# Altium PCB plobot_review.PcbDoc (part 2 of 2)
Units mil, origin at the board's own origin, x right, y up, seen from the top; angles counter-clockwise.
Board outline 3546.59 x 5237.31 mil, 2 copper layers (Top Layer, Bottom Layer); 114 components, 89 nets, 446 pads, 122 vias.
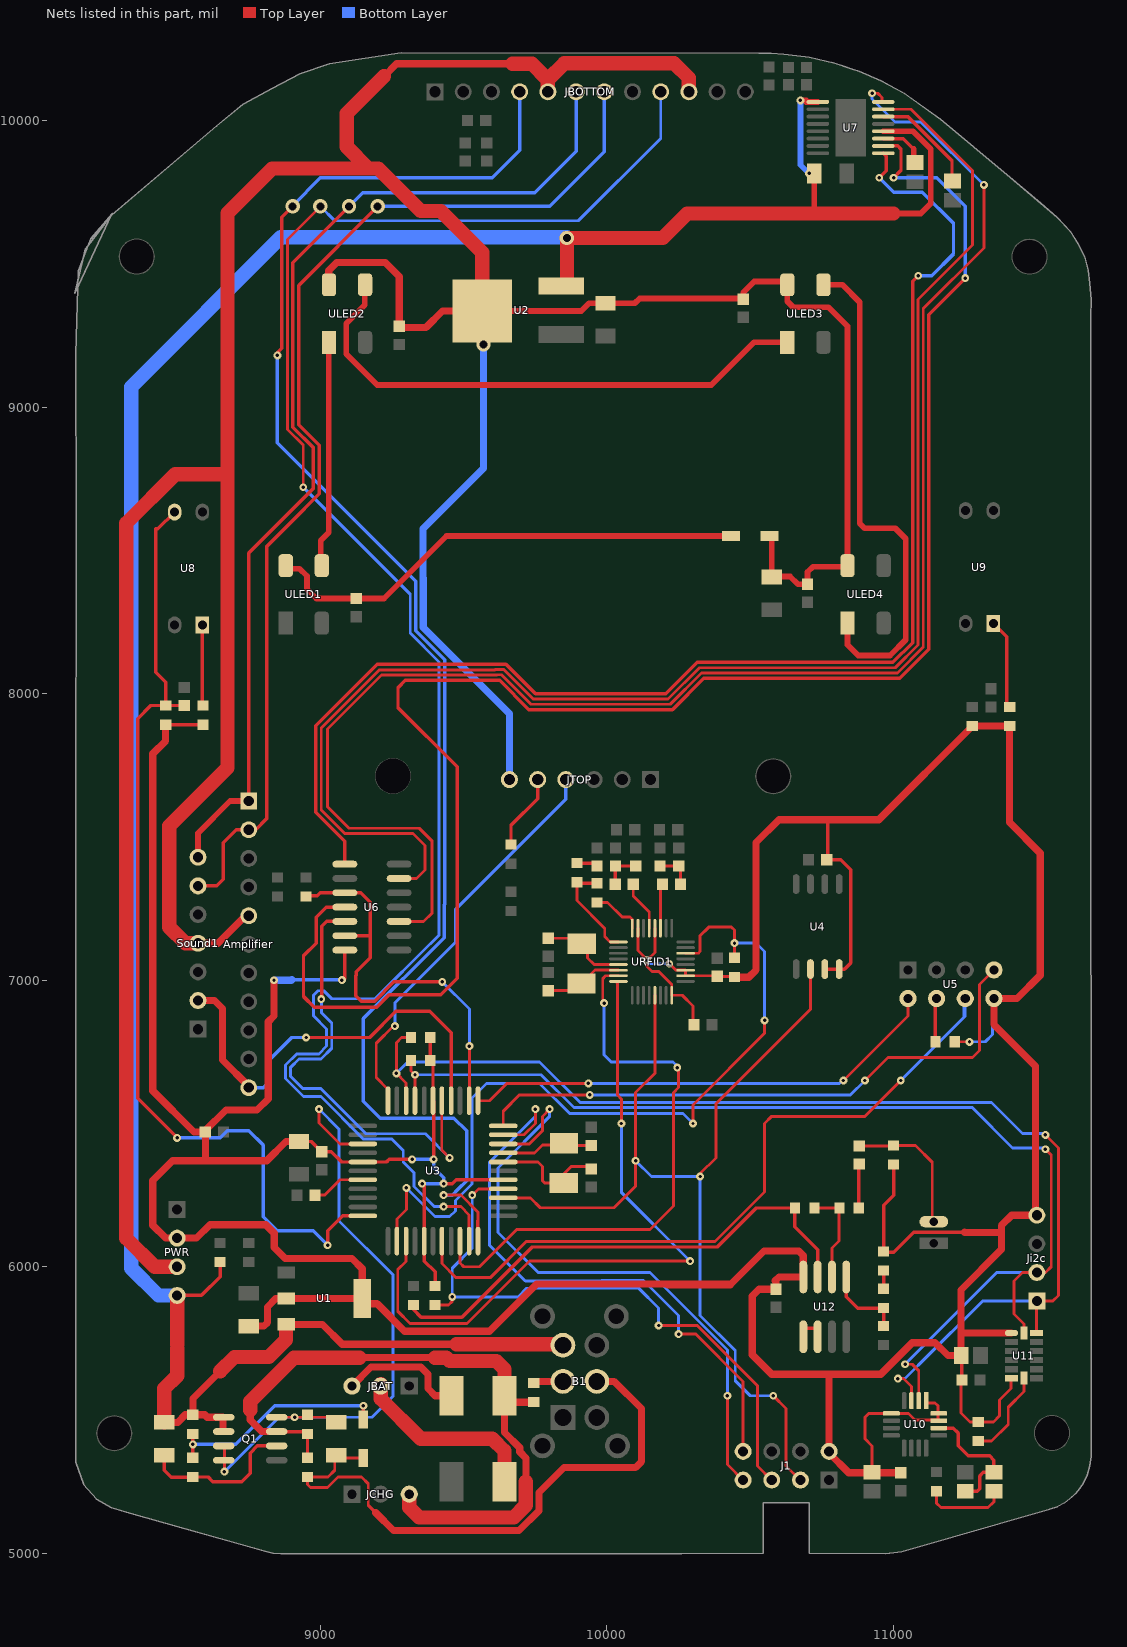
[diagram p2: the nets of this part, all layers, seen from the top]

## Via types
v1: diameter 27.56, hole 12, Top Layer to Bottom Layer, 101 vias
v2: diameter 50, hole 28, Top Layer to Bottom Layer, 16 vias
v3: diameter 25.98, hole 12, Top Layer to Bottom Layer, 4 vias
v4: diameter 27.6, hole 12, Top Layer to Bottom Layer, 1 vias

## Nets (pads, with @x,y where several pads share a name; then routed paths per layer and width w, separated by ;. In a path a pad name is that pad's centre, name@x,y a point inside that pad or via, vN(x,y) a via of type N, cw(c..) or ccw(c..) an arc to the next point about the centre after c; other vN are vias at no path point) (continued)
MTR-R-D2: U3.16 U6.12 | length 1605.7
  Top Layer w10: U3.16@9423.95,6579.55 9423.22,6578.82 9423.22,6407.78 v1(9451,6380)
  Top Layer w12: v1@9004.78,6945.78 9004.78,7187.78 9022,7205 U6.12@9085.51,7205
  Bottom Layer w10: v1(9003,6934) 9004,6935 9004,6886.46 9039.78,6850.68 9039.78,6762.45 9002.33,6725 8925,6725 8896.22,6696.22 8896.22,6663.91 8938.13,6622 9001,6622 9159,6464 9367,6464 v1(9451,6380)
MTR-R-EN: R15.2 U3.13 U6.10 U6.13 | length 1470.2
  Top Layer w10: U3.13@9518.95,6579.55 9520,6580.6 v1(9520,6770)
  Top Layer w12: R15.2@8949.53,7296 8951.53,7294 8989,7294 9000,7305 U6.10@9085.51,7305 9141,7305 9174,7272 9174,7155 ; U6.13@9085.51,7155 9174,7155 ; v1(9425,6994) 9256,6994 9189,6927 9142,6927 9124,6945 9124,7016 9125,7017 9125,7030 9174,7079 9174,7155
  Bottom Layer w10: v1(9425,6994) 9520,6899 v1(9520,6770)
MTR-R-I: C21.2 R17.1 U3.33 U8.3 | length 3462.1
  Top Layer w12: R17.1@8465,7963.46 8470,7958.46 8470.04,7958.5 C21.2@8525,7958.5 ; U8.3@8491.12,8633.47 8432.65,8575 8425,8575 8425,8075 8460,8040 R17.1@8460,7958.46 8408.46,7958.46 8362,7912 8362,6588 v1(8500,6450) ; v1(9025,6075) 9025,6125 9077.55,6177.55 U3.33@9147.95,6177.55
  Bottom Layer w12: v1(8500,6450) 8650,6450 8675,6475 8750,6475 8800,6425 8800,6175 8850,6125 8975,6125 v1(9025,6075)
NetB1_2: B1.2 CFG1.2 | length 104.8
  Top Layer w25: CFG1.2@9744.09,5594.49 9749.85,5600.24 B1.2@9846.2,5600.24 B1.2@9845.96,5600
NetB1_5: B1.5 C2.1 D1.1 R3.1 | length 2096.1
  Top Layer w10: R3.1@8955,5265 8955,5240 8965,5230 9025,5230 9061.54,5266.54 9143.46,5266.54 9167,5243 9167,5168 9193.07,5141.93 ; R3.1@8955,5266.54 9026.54,5266.54 9050,5290 C2.1@9050,5340 ; C2.1@9060,5335 9061.93,5333.07 D1.1@9150,5333.07 ; B1.5@9960,5600 B1.5@9962.03,5597.97
  Top Layer w25: 9193.07,5141.93 9255.34,5079.66 9693.43,5079.66 9762.36,5148.59 9762.36,5212.36 9850,5300 10100,5300 10120,5320 10120,5440 10120,5505 10024.76,5600.24 B1.5@9964.31,5600.24
NetC1_2: C1.2 Q1.2 R6.2 | length 553.1
  Top Layer w12: C1.2@8455,5340 8455,5290 8480,5265 8553.46,5265 R6.2@8555,5266.54 8608.46,5266.54 8625,5250 8725,5250 8755,5280 8755,5350 8780,5375 Q1.2@8847.52,5375
NetC6_2: C6.2 U3.7 XTAL1.2 | length 412.5
  Top Layer w10: U3.7@9637.95,6365.55 9759.45,6365.55 9775,6350 9775,6300 9782.58,6292.43 XTAL1.2@9849.06,6292.43 9849.06,6324.06 9875,6350 9900,6350 9936.5,6350 C6.2@9945,6341.5
NetC7_2: C7.2 U3.8 XTAL1.1 | length 310.3
  Top Layer w10: U3.8@9637.95,6397.55 9747.55,6397.55 9775,6425 9843.84,6425 XTAL1.1@9850.05,6431.2 ; XTAL1.1@9860.75,6423.5 C7.2@9945,6423.5
NetC8_1: C8.1 U3.29 | length 195.1
  Top Layer w10: C8.1@8975,6250 C8.1@8981.5,6250 9015,6250 9068.55,6303.55 U3.29@9147.95,6303.55
NetC14_2: C14.2 U7.11 | length 170.1
  Top Layer w12: U7.11@10964.17,9936.61 11033.39,9936.61 11070,9900
  Top Layer w20: C14.2@11060,9855 11070,9865 11070,9900
NetC17_2: C17.2 U7.14 | length 383.4
  Top Layer w12: U7.14@10964.17,10013.39 11051.61,10013.39 11055,10010 ; 11053.94,10010 11203.94,9860 11203.94,9796.06 C17.2@11205,9795 ; C17.2@11205,9788.46 C17.2@11205,9795 ; C17.2@11210,9790 C17.2@11205,9795
NetC26_1: C26.1 C27.1 U10.14 | length 460.8
  Top Layer w12: U10.14@11157.68,5437.2 11207.8,5437.2 11225,5420 11225,5375 11260,5340 11335,5340 11350,5325 C26.1@11350,5283.46 11313.46,5283.46 11300,5270 11300,5225 11291.54,5216.54 C27.1@11250,5216.54
NetC26_2: C26.2 R20.1 | length 286
  Top Layer w10: R20.1@11150,5216.54 11150,5175 11165,5160 11330,5160 11350,5180 C26.2@11350,5210
NetC28_1: C28.1 D2.1 ULED1.4 | length 1743.1
  Top Layer w20: ULED1.4@8878.94,8435.61 8927.39,8435.61 8953,8410 8953,8365 8986.5,8331.5 C28.1@9125,8331.5 9221.5,8331.5 9440,8550 10295,8550 ; 10330,8550 10295,8550 ; D2.1@10425,8545 10420,8550 10295,8550
NetC33_1: C33.1 R25.1 | length 155.6
  Top Layer w12: R25.1@10878.46,6205 10878.46,6358.46 C33.1@10880,6360
NetC33_2: C33.2 MIC1.1 R23.2 | length 501.9
  Top Layer w10: C33.2@10880,6421.5 10998.5,6421.5 R23.2@11000,6420 ; R23.2@11000,6423.46 11076.54,6423.46 11135,6365 11135,6150 MIC1.1@11140,6145
NetC38_1: C38.1 R30.1 | length 74.1
  Top Layer w12: R30.1@9895,7408.46 9955.04,7408.46 C38.1@9965,7398.5
NetC39_1: C39.1 C40.2 L1.2 | length 131.2
  Top Layer w12: C40.2@10185,7398.5 C39.1@10250,7398.5 10256.5,7392.01 L1.2@10256.5,7335
NetC42_1: C42.1 C45.1 L2.2 | length 134.1
  Top Layer w12: L2.2@10028.5,7335 10028.5,7397.01 C45.1@10030,7398.5 C42.1@10100,7398.5
NetC44_1: C44.1 URFID1.22 XRFID1.2 | length 239.4
  Top Layer w10: C44.1@9795,6963.5 XRFID1.2@9886.14,6963.5 ; XRFID1.2@9911.06,6988.43 9957.64,7035 URFID1.22@10040,7035
NetC46_1: C46.1 URFID1.21 XRFID1.1 | length 292.8
  Top Layer w10: C46.1@9795,7146.5 9885.55,7146.5 XRFID1.1@9912.05,7120 ; XRFID1.1@9912.05,7127.2 9932,7107.25 9932,7078 9955.31,7054.69 URFID1.21@10029.69,7054.69
NetD1_2: D1.2 R5.1 R6.1 | length 775.5
  Top Layer w12: R6.1@8555,5333.46 v1(8555,5380) R5.1@8555,5415 ; D1.2@9150,5466.93 v1@9150,5510
  Bottom Layer w12: v1(8555,5380) 8705,5380 8840,5515 v1(9150,5515)
NetF1_1: F1.1 JBAT.3 | length 445.8
  Top Layer w25: JBAT.3@9110,5583.46 9176.54,5650 9350,5650 9375,5625 9375,5575 9400,5550 F1.1@9457.48,5550
NetF2_1: F2.1 JBAT.2 | length 665.7
  Top Layer w50: JBAT.2@9210,5590.13 JBAT.2@9210,5583.46 9210,5540 9350,5400 9600,5400 9642.52,5357.48 F2.1@9642.52,5250
NetJTOP_5: JTOP.5 R1.2 | length 300.2
  Top Layer w10: R1.2@9665,7473.46 9665,7508.55
  Top Layer w12: R1.2@9665,7473.46 9665,7540 9758.03,7633.03 JTOP.5@9758.03,7700
NetL1_1: L1.1 URFID1.11 | length 158.7
  Top Layer w10: L1.1@10185,7330 10186.65,7328.35 L1.1@10186.65,7328.15 ; URFID1.11@10186.65,7181.65 L1.1@10186.65,7328.15 ; L1.1@10193.5,7335 L1.1@10186.65,7328.15
NetL2_1: L2.1 URFID1.13 | length 176.5
  Top Layer w10: L2.1@10091.5,7335 10091.5,7293.5 10147.28,7237.72 URFID1.13@10147.28,7181.65
NetR13_2: R13.2 U5.CH_PD | length 145.6
  Top Layer w12: U5.CH_PD@11145,6930 11145,6786.54 R13.2@11146.54,6785
NetR16_1: R16.1 U8.1 | length 286
  Top Layer w12: R16.1@8588.25,7961.71 R16.1@8588.25,7960.22 ; R16.1@8590,7958.46 R16.1@8588.25,7960.22 ; U8.1@8590,8238.01 U8.1@8588.25,8239.77 R16.1@8588.25,7960.22
NetR18_1: R18.1 U9.1 | length 310.7
  Top Layer w12: U9.1@11348.25,8244.77 11395,8198.01 R18.1@11395,7953.46
NetR21_2: R21.2 U11.7 | length 319.1
  Top Layer w10: R21.2@11295,5391.54 11341.54,5391.54 11400,5450 11400,5510 11455,5565 11455,5610 U11.7@11460,5615
NetR22_1: R22.1 R25.2 U12.6 | length 326.7
  Top Layer w10: R22.1@10723.46,6205 R25.2@10820,6205 ; U12.6@10785,5994.33 10785,6065 10810,6090 10810,6195 R25.2@10820,6205 ; R25.2@10820,6210 R25.2@10820,6205
NetR22_2: R22.2 R24.1 U12.7 | length 1747.4
  Top Layer w12: R24.1@9325,5850 9351,5824 9494,5824 9739,6069 10385,6069 10521,6205 R22.2@10655,6205 ; R22.2@10656.54,6205 R22.2@10655,6205 ; R22.2@10656.54,6210 R22.2@10660,6210 ; U12.7@10735,5994.33 10735,6060 10655,6140 R22.2@10655,6205
NetR26_2: R26.2 R27.1 U12.5 | length 305.9
  Top Layer w12: U12.5@10835,5994.33 10835,5895 10875,5855 10965,5855 R26.2@10965,5795
NetR27_2: R27.2 R28.1 | length 63.1
  Top Layer w12: R27.2@10965,5923.46 R28.1@10965,5986.54
NetR29_1: R29.1 R30.2 URFID1.17 | length 356.8
  Top Layer w10: R30.2@9895,7341.54 9895,7278.13 9992.26,7180.87 9992.26,7152 10010.84,7133.43 URFID1.17@10040,7133.43 URFID1.17@10039.7,7133.43
  Top Layer w12: R30.2@9895,7341.54 9898.07,7338.46 R29.1@9965,7338.46
NetR29_2: R29.2 URFID1.16 | length 178.1
  Top Layer w10: R29.2@9965,7271.54 10001.46,7271.54 10053,7220 10080,7220 10088.23,7211.77 URFID1.16@10088.23,7181.65
NetU6_3: U6.3 U7.16 | length 5644.4
  Top Layer w10: U6.3@9279.49,7200 U6.3@9274.49,7205 9360,7205 9390,7235 9390,7485 9345,7530 9100,7530 9025,7605 9025,7876.87 9213.13,8065 9615.59,8065 9616.59,8066 9632.33,8066 9735.33,7963 10220.67,7963 10329.67,8072 11013.13,8072 11103.46,8162.33 11103.46,9343.46 11315,9555 v1(11315,9775) ; v1(10925,10095) 10945,10095 10960,10080 U7.16@10960,10065
  Bottom Layer w10: v1(10925,10095) 10925,10075 11005,9995 11095,9995 v1(11315,9775)
NetU6_6: U6.6 U7.15 | length 5308.6
  Top Layer w10: U6.6@9274.49,7355 9335,7355 9365,7385 9365,7470 9323,7512 9084.87,7512 9003,7593.87 9003,7880.33 9205.67,8083 9608.13,8083 9609.13,8084 9639.78,8084 9742.78,7981 10213.22,7981 10322.22,8090 11005.67,8090 11085.46,8169.78 11085.46,9375.46 11275,9565 11275,9825 11061.02,10038.98 U7.15@10964.17,10038.98
NetU6_8: U6.8 U7.9 | length 4808
  Top Layer w12: U6.8@9085.51,7405 9085.51,7484.49 8984,7586 8984,7888.2 9197.8,8102 9570,8102 ; 9590,8102 9570,8102 ; v1(10950,9800) 10975,9825 10975,9874.61 U7.9@10964.17,9885.43 ; v1(11086,9458) 11066.46,9438.46 11066.46,9379.82 11066.46,8177.65 10997.8,8109 10314.35,8109 10205.35,8000 9750.65,8000 9647.65,8103 9571,8103 9570,8102
  Bottom Layer w12: v1(10950,9800) 11000,9750 11100,9750 11209,9641 11209,9534 11133,9458 v1(11086,9458)
NetU6_11: U6.11 U7.10 | length 6160.6
  Top Layer w12: U6.11@9085.51,7255 9020,7255 8984.78,7219.78 8984.78,7128.78 8941,7085 8941,6943 8977.78,6906.22 9196.5,6906.22 9239.46,6949.17 9419.46,6949.17 9477,7006.71 9477,7744.72 9270.69,7951.02 9270.69,8020.69 9296,8046 9625.46,8046 9727.46,7944 10228.54,7944 10337.54,8053 11021,8053 11122.46,8154.46 11122.46,9322.46 v1(11250,9450) ; U7.10@10964.17,9911.02 11013.98,9911.02 11025.99,9899.01 11025.99,9825.99 v1(11000,9800)
  Bottom Layer w12: v1(11000,9800) 11150,9800 11250,9700 v1(11250,9450)
NetU12_1: U12.1 U12.2 | length 50
  Top Layer w12: U12.1@10685,5785.67 U12.2@10735,5785.67
NetULED1_3: ULED1.3 ULED2.1 | length 808.5
  Top Layer w20: ULED1.3@9004.92,8435.61 9001,8439.54 9001,8534 9028.94,8561.94 9028.94,8738.06 ; ULED2.1@9028.94,9230.83 9028.94,8779 9028.94,8738.06 ; 9029,8738 9028.94,8738.06
NetULED2_3: ULED2.3 ULED3.1 | length 1919.1
  Top Layer w20: ULED2.3@9154.92,9431.61 9154.92,9355.92 9090,9291 9090,9250 9090,9185 9198,9077 10364,9077 10512.79,9225.79 ULED3.1@10629.23,9225.79
NetULED3_3: ULED3.3 ULED4.1 | length 1775.9
  Top Layer w20: ULED3.3@10755.21,9426.58 10821.42,9426.58 10882.23,9365.77 10882.23,8593.77 10899,8577 11006,8577 11042.46,8540.54 11042.46,8187.59 10987.86,8133 10877,8133 10839.23,8170.77 ULED4.1@10839.23,8245.79
PWR-OFF: C2.2 Q1.4 Q1.7 Q1.8 R4.1 U3.25 | length 2406.8
  Top Layer w10: v1(8665,5285) 8665,5350 ; Q1.8@8665,5330 8665,5350 ; Q1.7@8665,5375 8665,5350 ; Q1.4@8847.52,5475 v1(8910,5475) 9045,5475 C2.2@9050,5470 ; v1@8995,6555 v1(8995,6550) 8995,6501.87 9068.32,6428.55 U3.25@9147.95,6428.55
  Bottom Layer w10: v1(8665,5285) 8855,5475 v1(8910,5475) 9180,5475 9253,5548 9253,5972 9065,6160 9065,6400 ; v1(8995,6550) 9065,6480 9065,6400 ; 9065,6450 9065,6400
RESET: J1.5 R12.2 U3.4 | length 2191.2
  Top Layer w10: R12.2@9400,5866.54 9446.54,5866.54 9460,5880 v1(9460,5895) v1@9465,5895 ; v1(9530,6250) 9551.55,6271.55 9566.55,6271.55 9575,6271.55 U3.4@9637.95,6271.55 ; v1(10180,5795) 10315,5795 10525,5585 10525,5305 J1.5@10575,5255
  Bottom Layer w10: v1(9530,6250) 9530,6065 9460,5995 v1(9460,5895) 9690,5895 9720,5925 10111,5925 10180,5856 v1(10180,5795)
RFID-CS: U3.36 URFID1.24 | length 2467.4
  Top Layer w10: U3.36@9298.95,6089.55 9298.95,6018.95 9270,5990 9270,5845 9313.1,5801.9 9511.9,5801.9 9730,6020 v1(10290,6020) ; URFID1.24@10030,6995 10036.78,6988.22 10036.78,6668.22 10036.78,6599.22 10050,6586 v1(10050,6500)
  Bottom Layer w10: v1(10050,6500) 10050,6260 v1(10290,6020)
RFID-RST: R31.2 U3.35 URFID1.6 | length 2897.7
  Top Layer w10: 9266.95,6141.95 U3.35@9266.95,6089.55 9266.95,6166.95 9300,6200 v1(9300,6275) ; URFID1.6@10274.25,7094.06 10319.06,7094.06 10325,7100 10325,7155 10355,7185 10435,7185 10445,7175 v1(10445,7129.23) R31.2@10445,7083.46 ; v1(10300,6500) 10300,6565 10550,6815 v1(10550,6860)
  Bottom Layer w10: v1(9300,6275) 9400,6175 9451,6175 9471,6195 9471,6231 9529,6289 9529,6589 9580,6640 9765,6640 9870,6535 10265,6535 v1(10300,6500) ; v1@10445,7130 10520,7130 10550,7100 v1(10550,6860)
RFID_INT: U3.42 URFID1.23 | length 2015.2
  Top Layer w10: U3.42@9486.95,6089.55 9486.95,6013.05 9500,6000 9555,6000 9685,6130 10150,6130 10232,6212 10232,6535 10232,6607.46 10250,6625.46 10250,6690 v1(10245,6695) ; v1@9985,6920 v1(9990,6920) 9985,6925 9985,7005 9995.32,7015.31 URFID1.23@10040,7015.31
  Bottom Layer w10: v1(9990,6920) 9990,6740 10015,6715 10230,6715 10245,6700 v1(10245,6695)
RST_WIFI: U3.40 U5.RST | length 2564.2
  Top Layer w10: U3.40@9423.95,6089.55 9423.95,6011.05 9473,5962 9592.46,5962 9718.46,6088 10377.13,6088 10550,6260.87 10550,6500 10575,6525 10900,6525 v1(11025,6650)
  Bottom Layer w10: v1(11025,6650) 11245,6870 ; U5.RST@11245,6930 11245,6870 ; U5.RST@11250.12,6936.06 11250.12,6875.12 11245,6870
RXD_FTDI: J1.8 U3.10 | length 2091.5
  Top Layer w10: U3.10@9637.95,6460.55 9710.55,6460.55 9750,6500 v1(9750,6550) ; v1(10250,5765) 10310,5765 10475,5600 J1.8@10475,5355.85 J1.8@10475,5350
  Bottom Layer w10: v1(9750,6550) 9750,6525 9590,6365 9590,6075 9715,5950 9978.22,5950 9980.63,5952.41 10127.59,5952.41 10250,5830 v1(10250,5765)
RXD_WIFI: U3.12 U5.TXD | length 1688.5
  Top Layer w10: U3.12@9549.95,6579.55 9589.55,6579.55 9650,6640 v1(9935,6640) ; v1(10825,6650) 11050.12,6875.12 U5.TXD@11050.12,6936.06 ; U5.TXD@11045,6930 U5.TXD@11050,6930
  Bottom Layer w10: v1(9935,6640) 10615,6640 10811.7,6640 10821.7,6650 v1(10825,6650)
SCK: J1.3 U3.3 U4.6 URFID1.29 | length 3588.9
  Top Layer w10: U3.3@9637.95,6240.55 9704.45,6240.55 9705.01,6239.99 9733.14,6239.99 9767.13,6206 10025,6206 10100,6281 v1(10100,6370) 10100,6608.03 10166.97,6675 URFID1.29@10166.97,6947.4 ; v1@10325,6325 10380,6380 10380,6568.63 10710.04,6898.67 U4.6@10710.04,7038.85 ; v1(10580,5550) 10625,5505 10625,5305 J1.3@10674.58,5255.43
  Bottom Layer w10: v1(10100,6370) 10155,6315 v1(10325,6315) 10325,5830.46 10447.46,5708 10447.46,5602.54 10500,5550 v1(10580,5550) ; J1.3@10675,5270 J1.3@10675,5255.85 J1.3@10675.85,5255.85
SCL: Ji2c.2 R10.1 U3.19 U10.2 U11.14 | length 3974.5
  Top Layer w10: R10.1@9316.54,6720 9316.54,6718.46 9316.54,6683.42 v1(9329.95,6670) U3.19@9329.95,6579.55 ; v1(11040,5660) 11065,5660 11087.8,5637.2 11087.8,5612.2 U10.2@11087.8,5532.68 ; U11.14@11455,5765 U11.14@11455,5768.74 11455,5800 11420,5835 11420,5950 11450,5980 Ji2c.2@11500,5980 11530,5980 11550,6000 11550,6390 v1(11530,6410)
  Bottom Layer w10: v1(9329.95,6670) 9770,6670 9884.78,6555.22 11274.78,6555.22 11415,6415 v1@11530,6415 ; v1(11040,5660) 11360,5980 Ji2c.2@11500,5980
SDA: Ji2c.1 R11.1 U3.20 U10.3 U11.13 | length 4160.6
  Top Layer w10: U3.20@9298.95,6579.55 9298.95,6641.05 v1(9265,6675) 9265,6782 9283,6800 R11.1@9316.54,6800 ; v1@11010,5610 v1(11015,5610) 11035,5610 11062.2,5582.8 U10.3@11062.2,5532.68 ; Ji2c.1@11495,5885 11498.31,5881.69 U11.13@11498.31,5768.74 ; Ji2c.1@11500,5880 11555,5880 11575,5900 11575,6415 v1(11530,6460)
  Bottom Layer w10: v1@9270,6675 v1(9265,6675) 9305,6715 9765,6715 9906.78,6573.22 11341.78,6573.22 11450,6465 v1@11535,6465 ; v1(11015,5610) 11040,5610 11075,5645 11095,5665 11310,5880 Ji2c.1@11500,5880
SPK: Amplifier.11 Sound1.2 U3.15 | length 1538.5
  Top Layer w12: v1(8950,6800) 9172.31,6800 9263.48,6891.17 9380.83,6891.17 9455.95,6816.05 U3.15@9455.95,6579.55
  Top Layer w25: Sound1.2@8573,6929 8630,6929 8658,6901 8658,6722 8750,6630 Amplifier.11@8750,6625
  Bottom Layer w12: Amplifier.11@8750,6625 8800,6625 8825,6650 8825,6725 8900,6800 v1(8950,6800)
SPK-A: Amplifier.2 JBOTTOM.7 Sound1.6 | length 3847
  Top Layer w12: Sound1.6@8573,7329 8638,7329 8661,7352 8661,7480 8706,7525 Amplifier.2@8750,7525 8774,7525 8812,7563 8812,8513.12 8895.94,8597.06 8995.78,8696.9 8995.78,8866.37 8924,8938.15 8924,9424 v2(9200,9700)
  Bottom Layer w12: v2(9200,9700) 9800,9700 9990.55,9890.55 JBOTTOM.7@9990.55,10100
SPK-B: Amplifier.1 JBOTTOM.6 Sound1.7 | length 3666.4
  Top Layer w12: Amplifier.1@8750,7625 8750,8490.71 8975.78,8716.49 8975.78,8858.09 8904,8929.87 8904,9504 v2(9100,9700)
  Top Layer w20: Sound1.7@8573,7429 8573,7513 8685,7625 Amplifier.1@8750,7625
  Bottom Layer w12: v2(9100,9700) 9148.3,9748.3 9748.3,9748.3 9892.13,9892.13 JBOTTOM.6@9892.13,10100
SRV-L: JBOTTOM.9 U3.43 | length 6241.7
  Top Layer w10: v1(8940,8720) 8940,8867 8885,8922 8885,9585 v2(9000,9700) ; v4(9430,6210) 9490,6210 9518.95,6181.05 U3.43@9518.95,6089.55
  Bottom Layer w10: v1(8940,8720) 9313.5,8346.5 9313.5,8211.57 9414.22,8110.85 9414.22,7272.66 9413.22,7271.66 9413.22,7156.35 9385.09,7128.22 ; v2(9000,9700) 9050,9650 9900,9650 10187.4,9937.4 JBOTTOM.9@10187.4,10100 ; 9384.22,7128.22 9191.22,6935.22 9039.65,6935.22 9011.87,6963 8991.63,6963 8976.22,6947.59 8976.22,6875.65 9021.78,6830.09 9021.78,6769.91 8994.87,6743 8917.54,6743 8878.22,6703.68 8878.22,6656.45 8940.67,6594 9001.55,6594 9149.55,6446 9249,6446 9289,6406 9289,6366 9327,6328 9327,6280.13 9397.13,6210 v4(9430,6210)
SRV-R: JBOTTOM.4 U3.44 | length 5576.7
  Top Layer w10: v1(9430,6250) 9490,6250 9549.95,6190.05 U3.44@9549.95,6089.55 9548,6091.5 9548,6162
  Top Layer w12: v1(8850,9180) 8850,9190 8865,9205 8865,9662 v2(8903,9700)
  Bottom Layer w12: v1(8850,9180) 8850,8875 9332.5,8392.5 9332.5,8219.44 9433.22,8118.72 9433.22,7264.79 9432.22,7263.79 9432.22,7148.48 9150.01,6866.26 9150.01,6577.5 9208.5,6519 9466,6519 9510,6475 9510,6300 9480,6270 9460,6250 v1(9430,6250) ; v2@8903,9703 9000,9800 9600,9800 9695.28,9895.28 JBOTTOM.4@9695.28,10100
TRIG: JTOP.4 U3.22 | length 1417.4
  Top Layer w10: U3.22@9235.95,6579.55 9235.95,6619.05 9195,6660 9195,6780 9255,6840 v1(9260,6840)
  Bottom Layer w10: v1@9256.91,6840 v1(9260,6840) 9260,6921.1 9472.22,7133.32
  Bottom Layer w12: 9472.22,7133.32 9472.22,7247.22 9856.45,7631.45 JTOP.4@9856.45,7700
TXD_FTDI: J1.7 U3.9 | length 2196
  Top Layer w10: U3.9@9637.95,6428.55 9728.39,6428.55 ; 9728.47,6428.63 9728.39,6428.55 ; 9730,6430 9728.55,6428.55 ; v1(9800,6550) 9774.84,6524.84 9774.84,6474.84 9728.55,6428.55 ; v1(10420,5550) 10420,5310 J1.7@10475,5255 ; 9728.39,6428.55 9728.55,6428.55
  Bottom Layer w10: v1(9800,6550) 9800,6525 9620,6345 9620,6120 9760,5980 10150,5980 10420,5710 v1(10420,5550)
TXD_WIFI: U3.11 U5.RXD | length 2099.9
  Top Layer w10: U3.11@9637.95,6491.55 9637.95,6542.95 9695,6600 v1(9940,6600) ; v1(10900,6650) 10980,6730 11275,6730 11300,6755 11300,6985 11340,7025 U5.RXD@11345,7025
  Bottom Layer w10: v1@9945,6605 v1(9940,6600) 10850,6600 v1(10900,6650)
V3: C3.1 C5.1 C9.1 C10.2 C12.1 C23.1 C24.1 C29.1 C30.1 C35.1 C36.2 C37.2 J1.2 Ji2c.4 PWR.2 R10.2 R11.2 R12.1 R13.1 R16.2 R17.2 R18.2 R19.2 R21.1 R23.1 R28.2 R31.1 U1.2 U3.5 U3.17 U3.27 U3.38 U4.7 U4.8 U5.VCC U6.14 U10.1 U10.5 U10.15 U10.16 U11.1 U11.6 U12.8 URFID1.2 URFID1.3 URFID1.12 URFID1.15 URFID1.32 | length 18515.7
  Top Layer w10: R17.2@8465,7886.54 R17.2@8470,7891.54 ; v1(9355,6290) v1@9361.95,6283.05 ; R10.2@9383.46,6720 R10.2@9392.95,6710.51 ; U3.17@9392.95,6579.55 U3.17@9395,6577.5 ; URFID1.15@10107.91,7181.65 10107.91,7103.29 v1@10140.6,7070.6 ; URFID1.12@10166.97,7181.65 10166.97,7096.97 v1@10140.6,7070.6 ; v1(10217.27,7057.27) 10217.73,7057.27 10240,7035 URFID1.3@10274.25,7035 URFID1.2@10274.25,7015.31 10384.68,7015.31 C37.2@10385,7015 ; C36.2@10300,6845 10300,6910 10262.6,6947.4 URFID1.32@10226.02,6947.4 10226.02,6985.18 10180.6,7030.6 10157.19,7030.6 10140,7047.79 v1(10140,7070) v1@10140.6,7070.6 ; C37.2@10385,7013.5 10443.03,7013.5 R31.1@10445,7011.54 ; R31.1@10443.03,7018.5 R31.1@10445,7016.54 ; C24.1@10925,5283.46 10925,5325 10925,5375 10900,5400 10900,5475 10913.39,5488.39 U10.5@10992.32,5488.39 11051.61,5488.39 11075,5465 11160,5465 11155,5470 11155,5515 11145,5525 U10.1@11115,5525 ; R13.1@11213.46,6785 v1(11265,6785) ; C29.1@11235,5605 11235,5490 11266.54,5458.46 R21.1@11295,5458.46 11348.46,5458.46 11370,5480 11370,5535 11410,5575 U11.6@11410,5610
  Top Layer w12: R17.2@8460,7891.54 8470,7891.54 R16.2@8590,7891.54 ; C10.2@8925,6437.09 8967.91,6437.09 C9.1@9005,6400 ; C9.1@9005,6401.93 9038.07,6401.93 9074.45,6365.55 U3.27@9147.95,6365.55 9230.55,6365.55 9240,6375 v1(9320,6375) ; v1(9075,7000) 9075,6995 9085.51,7005.51 U6.14@9085.51,7105 ; v1@9361.95,6283.05 U3.38@9361.95,6089.55 9361.95,6020 9400,5981.95 9400,5975 ; R10.2@9383.46,6720 R11.2@9383.46,6800 ; U3.17@9392.95,6579.55 R10.2@9392.95,6710.51 ; v1(9395,6375) U3.17@9395,6577.5 ; R12.1@9400,5925 R12.1@9400,5933.46 9400,5975 ; 9400,5960 9400,5975 ; v1(9430,6290) 9460,6290 9473.55,6303.55 U3.5@9637.95,6303.55 ; C35.1@10590,5920 C35.1@10590,5921.5 ; U4.7@10763.85,7038.85 10806.15,7038.85 U4.8@10810,7035 ; J1.2@10770,5355 J1.2@10785,5355 ; 10770,7560 10770,7423.5 C5.1@10766.5,7420 10815,7420 10850,7385 10850,7060 10828.85,7038.85 U4.8@10810.04,7038.85 ; R28.2@10970,6050 11000,6050 11070.78,6120.78 11247,6120.78 ; R28.2@10970,6053.46 R28.2@10965,6053.46 10965,6215 11000,6250 11000,6350 R23.1@11010,6360 ; C30.1@11236.54,5690 11238.5,5688.03 C29.1@11238.5,5605
  Top Layer w25: R17.2@8460,7891.54 8460,7835 8415,7790 8415,6614 8559,6470 C12.1@8598.5,6470 ; R16.2@8590,7891.54 R16.2@8590,7895 ; 8598.5,6371.5 C12.1@8598.5,6470 ; C3.1@8750,5792.91 8802.91,5792.91 8815,5805 8815,5860 8844.4,5889.4 U1.2@8880.13,5889.4 8925,5889.4 8950,5889.4 U1.2@9145.87,5889.4 9145.87,5993.13 9110,6029 8877,6029 8839,6067 8839,6117 8811,6145 ; 8810,6145 8811,6145 ; v1(8838,6999.72) 8838,6875.07 8817.72,6854.79 8817.72,6585.72 8779,6547 8670.13,6547 8598.5,6475.37 C12.1@8598.5,6470 ; C10.2@8925,6437.09 8880.09,6437.09 8813,6370 8484,6370 8415,6301 8415,6145 8460,6100 PWR.2@8500,6100 8568.1,6100 8614.6,6146.5 8809.5,6146.5 8811,6145 ; U1.2@9164.41,5870.87 9198,5870.87 9293.87,5775 9590,5775 9755,5940 10433,5940 ; 10211,5937 10430,5937 10433,5940 ; R31.1@10445,7010 10495,7010 10520,7035 10520,7480 10600,7560 10770,7560 10948.46,7560 R19.2@11275,7886.54 R18.2@11405,7886.54 11405,7550 11512,7443 11512,7017 11431.06,6936.06 U5.VCC@11350.12,6936.06 11350.12,6844.88 11495,6700 11495,6635 Ji2c.4@11495,6190 ; J1.2@10775,5350 10843.5,5281.5 C23.1@11025,5281.5 ; J1.2@10775,5355.85 10775,5625 ; 11247,6120.78 11247.78,6120 11376,6120 ; U11.1@11411.69,5768.74 11238.74,5768.74 11235,5765 ; Ji2c.4@11500,6180 11412,6180 11376,6144 11376,6120 ; 10433,5940 10548,6055 10669,6055 10685,6039 U12.8@10685,5964.33 10600.31,5964.33 10587,5951.02 10590,5948.02 C35.1@10590,5921.5 10530.5,5921.5 10507,5898 10507,5693 10575,5625 10775,5625 ; 10775,5625 10780,5625 10955,5625 11065,5735 11145,5735 11190,5690 11235,5690 11235,5765 ; 11235,5765 11235,5919 11376,6060 11376,6120
  Bottom Layer w10: v1(10140,7070) 10152.73,7057.27 v1(10217.27,7057.27) ; v1(11265,6785) 11320,6785 11345,6810 U5.VCC@11345,6930
  Bottom Layer w12: 8900,7001.72 8900.28,7002 9073,7002 v1(9075,7000) ; v1(9320,6375) v1(9395,6375) 9395,6345 9430,6310 v1(9430,6290) v1(9355,6290)
  Bottom Layer w25: v1(8838,6999.72) 8898,6999.72 8900,7001.72
V5: Amplifier.5 C4.2 C25.1 C31.1 C32.1 C34.1 D2.2 JBOTTOM.5 JBOTTOM.10 JTOP.6 PWR.3 Sound1.4 U2.2 ULED2.4 ULED3.4 ULED4.4 | length 14370
  Top Layer w12: ULED3.4@10627.81,9428 ULED3.4@10629.23,9426.58 ; 10839.23,8518.23 ULED4.4@10839.23,8446.58 ULED4.4@10841,8448.35
  Top Layer w20: ULED2.4@9028,9417 9025,9420 9025,9427.68 9028.94,9431.61 ULED2.4@9028.94,9458.54 ; U2.2@9565,9335 U2.2@9575,9335 ; U2.2@9590,9315 9607.17,9332.17 9607.17,9335 9910,9335 9937.09,9362.09 C4.2@9995,9362.09 10097.09,9362.09 10114,9379 10472.5,9379 C32.1@10475,9376.5 10475,9399 10514,9438 ULED3.4@10617.81,9438 ; JBOTTOM.5@9792,10101.7 JBOTTOM.5@9793.7,10100 ; D2.2@10566.93,8550 10575,8541.93 C25.1@10575,8407.09 10576.91,8409 10639,8409 10666.5,8381.5 C34.1@10700,8381.5 10700,8424 10719,8443 10835.65,8443 ULED4.4@10839.23,8446.58 10839.23,9282 10773.23,9348 10650,9348 10629.23,9368.77 ULED3.4@10629.23,9426.58 ; ULED3.4@10628.94,9428 10627.81,9428 10627.55,9428 10628.94,9426.61 ULED3.4@10629.23,9426.58
  Top Layer w25: Sound1.4@8573,7129 8643,7129 8739,7225 Amplifier.5@8750,7225 ; ULED2.4@9028.94,9431.61 9028.94,9475.94 9057,9504 9226,9504 9275,9455 C31.1@9275,9281.5 9278.5,9278 9369,9278 9426,9335 U2.2@9565,9335 ; 9221.73,10153.76 9265.7,10197.73 9670,10197.73
  Top Layer w50: PWR.3@8500,6000 8422,6000 8323,6099 8323,8595 8493,8765 8676,8765 ; Sound1.4@8573,7129 8529,7129 8473,7185 8473,7538 8676,7741 8676,8765 ; 9221.73,10153.76 9092,10024.02 9092,9908 9167.69,9832.31 ; U2.2@9565,9335 9565,9539 9420,9684 9350,9684 9201.69,9832.31 9167.69,9832.31 ; 9670,10197.73 9738.27,10197.73 9792,10144 ; JBOTTOM.5@9793.7,10100 9793.7,10142.3 9851.4,10200 10234,10200 10285.83,10148.17 JBOTTOM.10@10285.83,10100 ; 8676,8765 8676,9676 8832.31,9832.31 9167.69,9832.31
  Bottom Layer w25: v2@9574,9220.09 9571.09,9220.09 v2(9569,9218) 9569,8786 9358,8575 9358,8404.48 9359,8403.48 9359,8230.41 9659.6,7929.81 JTOP.6@9659.6,7700
VBATT: B1.3 C1.1 C11.2 PWR.4 Q1.5 Q1.6 R5.2 R8.2 U1.3 U2.3 U7.1 U7.12 | length 9843.2
  Top Layer w12: PWR.4@8500,5900 8585,5900 8650,5965 R8.2@8650,6016.54 R8.2@8650,6020
  Top Layer w20: v1(10675,10070) 10695,10070 U7.1@10700,10065 ; 10695.43,10064.57 U7.1@10735.83,10064.57 ; 10722.91,9677.09 C11.2@10722.91,9815 ; U7.12@10964.17,9962.2 11067.8,9962.2 11130,9900 11130,9710 11095,9675 11000,9675
  Top Layer w25: C1.1@8445,5455 C1.1@8455,5465 ; C1.1@8455,5457.09 8502.09,5457.09 8528.46,5483.46 R5.2@8555,5483.46 ; R5.2@8555,5480 8558.46,5480 R5.2@8555,5483.46 ; 8650,5635 8555,5540 R5.2@8555,5483.46 ; Q1.6@8660,5427.48 8660,5475 8605,5475 8596.54,5483.46 R5.2@8555,5483.46 ; U1.3@8880.13,5798.85 9006.8,5798.85 9076.15,5729.5 9475,5729.5
  Top Layer w50: C1.1@8455,5457.09 C1.1@8455,5465 ; C1.1@8455,5460 C1.1@8455,5465 ; 8500,5716 8500,5620 8455,5575 C1.1@8455,5465 ; 8500,5730 PWR.4@8500,5900 ; 8650,5635 8700,5685 8820,5685 8880,5745 8880,5795 U1.3@8880.13,5795 ; 9475,5729.5 9842.92,5729.5 B1.3@9846.2,5726.22 ; B1.3@9846.2,5725 B1.3@9850,5725 ; v2(9860,9590) 10195,9590 10280,9675 11000,9675 ; U2.3@9860.35,9421.61 v2@9860.35,9589.65
  Bottom Layer w20: v1(10675,10070) 10675,9845 v1(10705,9815)
  Bottom Layer w50: PWR.4@8500,5900 8435,5900 8340,5995 8340,9070 8862,9592 9677,9592 v2@9860,9592
VRAW: CFG1.1 F1.2 JCHG.3 Q1.3 R3.2 R4.2 | length 2406.9
  Top Layer w12: Q1.3@8847.52,5425 8950,5425 R4.2@8955,5420 ; R3.2@8955,5333.46 R4.2@8955,5410
  Top Layer w25: 8755,5500 8755,5465 8795,5425 Q1.3@8840,5425 ; 8755,5525 8755,5530 ; 9124.83,5671.5 9136.33,5683 9400,5683 ; F1.2@9642.52,5550 9642.52,5421.83 9695.5,5368.85 9695.5,5354.5 9716.86,5333.14 9716.86,5250 ; F1.2@9664.96,5527.56 CFG1.1@9744.09,5527.56
  Top Layer w50: 8755,5500 8755,5525 ; 8755,5530 8908,5683 9136.33,5683 ; JCHG.3@9310,5206.54 9310,5160 9344.84,5125.16 9674.58,5125.16 9716.86,5167.43 9716.86,5250 ; 9400,5683 9439.48,5683 9450.98,5671.5 9613.54,5671.5 9642.52,5642.52 F1.2@9642.52,5550
pads on no net: Amplifier.3 Amplifier.4 Amplifier.7 B1.0 B1.1 B1.6 Sound1.3 Sound1.5 U4.3 U5.GPIO2 U7.8 U10.4 U10.6 U10.7 U11.3 U11.9 U11.10 U11.11 U11.12 ULED4.3 URFID1.7 URFID1.8 URFID1.9 URFID1.19 URFID1.20 URFID1.25 URFID1.26 URFID1.27 URFID1.28

## Polygon pours and split planes (outlines as drawn)
GND on Bottom Layer "ANT_GND" (solid, pour order 12): 11539.5,5703.1 11471.22,5775 11182.35,5775 11145.59,5775 10925,5542.7 10925,5199.78 10925,5188.72 10956.51,5155.53 10961.76,5150 11292.65,5150 11513.24,5150 11550,5188.72 11550,5692.04
GND on Bottom Layer "ANT_GND" (solid, remove dead copper, pour order 10): 10348.91,7682.27 10348.91,7726.14 10297.78,7770 9934.23,7770 9928.55,7770 9911.51,7755.38 9911.51,7604.29 9911.51,7579.92 9803.58,7487.32 9655.89,7360.61 9655.89,7311.87 9655.89,7238.76 9599.08,7190.03 9565,7160.78 9565,6921.97 9593.4,6897.6 9701.33,6805 9871.75,6805 10485.24,6805 10525,6839.12 10513.64,6848.86 10513.64,7550.68 10513.64,7584.8 10348.91,7726.14
GND on Bottom Layer "ANT_GND" (solid, pour order 2): 11325,6420 11325,6000 11180,5855 10990,5665 10865,5665 10565,5665 10560,5660 10550,5670 10550,6040 10550,6080 10610,6140 10610,6360 10610,6410 10660,6460 10680,6480 11270,6480
GND on Bottom Layer "ANT_GND" (solid, remove dead copper, pour order 20): 10700,10125 10700,9775 10725,9750 10925,9750 10950,9775 10950,9932.78 10950,10100 10925,10125

## Keep-outs
Keep-Out Layer:
  lines w0.5: 8145.22,9398.7 cw(c8499.55,9398.7) 8271.79,9670.14 ; 8807.69,5006.05 ccw(c8861.77,5195.33) 8861.77,4998.48 ; 10530.9,10234.7 cw(c10530.9,9250.45) 11163.56,10004.43 ; 10971.98,4998.48 ccw(c10971.98,5195.33) 11026.06,5006.05 ; 11545.76,5154.53 ccw(c11491.68,5343.81) 11688.53,5343.81
  lines w0.51: 8145.22,5343.81 ccw(c8342.07,5343.81) 8287.99,5154.53 8807.69,5006.05 ; 8271.79,9670.14 8670.18,10004.43 cw(c9302.85,9250.45) 9302.85,10234.7 9916.87,10234.7 10530.9,10234.7 ; 8861.77,4998.48 9852.5,4998.48 ; 8889.26,4998.48 9488.24,4998.48 ; 9830,4998.48 10545.38,4998.48 10545.38,5177.62 ; 10545,5177.5 10705.62,5177.5 ; 10705.5,4998.35 10705.5,5177.5 ; 10705.62,4998.48 10971.98,4998.48 ; 11026.06,5006.05 11545.76,5154.53 ; 11163.57,10004.43 11561.96,9670.14 cw(c11334.2,9398.7) 11688.53,9398.7 11688.53,5343.81
  lines w3.94: 9755,8074 9755,8210 ; 10075,8075 10075,8210
  lines w7.87: 9755,8074 10075,8074 ; 9500.76,8217.79 9500.76,8493.38 ; 9500.76,8217.79 9500.76,8493.38 ; 9500.76,8217.79 9500.76,8493.38 ; 9500.76,8493.38 10327.53,8493.38 ; 9500.76,8493.38 10327.53,8493.38 ; 9500.76,8493.38 10327.53,8493.38 ; 10327.53,8217.79 10327.53,8493.38 ; 10327.53,8217.79 10327.53,8493.38 ; 10327.53,8217.79 10327.53,8493.38

## Silkscreen, mask and mechanical layers (free items; w line width, h text height)
Top Overlay:
  text "MLB" at 9400,10142.52 h30 r90
  text "MLA" at 9500,10142.52 h30 r90
  text "GND" at 9600,10142.52 h30 r90
  text "ARMR" at 9700,9925 h30 r90
  text "5V" at 9800,9925 h30 r90
  text "SPKB" at 9900,9925 h30 r90
  text "SPKA" at 10000,9925 h30 r90
  text "GND" at 10100,9925 h30 r90
  text "ARML" at 10200,9925 h30 r90
  text "+5V" at 10300,9925 h30 r90
  text "MRB" at 10400,9925 h30 r90
  text "MRA" at 10500,9925 h30 r90
  text "MTR-R-I" at 8500,8700 h30 r90
  text "GND" at 8600,8700 h30 r90
  text "GND" at 11375,8700 h30 r90
  text "MTR-L-I" at 11275,8695.36 h30 r90
  text "+5V" at 9675,7775 h30 r90
  text "TRIG" at 9775,7775 h30 r90
  text "ECHO" at 9875,7775 h30 r90
  text "GND" at 9975,7775 h30 r90
  text "ANTA" at 10075,7775 h30 r90
  text "ANTB" at 10175,7775 h30 r90
  text "SPKB" at 8400,7425 h30
  text "SPKA" at 8400,7300 h30
  text "+5V" at 8425,7125 h30
  text "SPK" at 8425,6925 h30
  text "GND" at 8425,6825 h30
  text "GND" at 8350,6175 h30
  text "3V" at 11575,6175 h30
  text "3V" at 8375,6100 h30
  text "GND" at 11575,6075 h30
  text "5V" at 8375,5975 h30
  text "SCL" at 11575,5975 h30
  text "VBAT" at 8325,5875 h30
  text "SDA" at 11575,5875 h30
  text "B7V" at 9125,5625 h30 r90
  text "B3V" at 9225,5625 h30 r90
  text "GND" at 9325,5625 h30 r90
  text "XSP_header" at 10525,5500 h30
  text "RXD" at 10500,5400 h30 r90
  text "GND" at 10600,5400 h30 r90
  text "MOSI" at 10700,5400 h30 r90
  text "+3V" at 10800,5400 h30 r90
  text "TXD" at 10475,5100 h30 r90
  text "RST" at 10525,5100 h30 r90
  text "SCK" at 10750,5100 h30 r90
  text "MISO" at 10800,5075 h30 r90
Bottom Overlay:
  drawing of 1929 lines, arcs and shapes, not listed
  text "MLB" at 9375,9825 h30 r270
  text "MLA" at 9475,9825 h30 r270
  text "GND" at 9575,9825 h30 r270
  text "ARMR" at 9675,9825 h30 r270
  text "5V" at 9775,9825 h30 r270
  text "SPKB" at 9875,9825 h30 r270
  text "SPKA" at 9975,9825 h30 r270
  text "GND" at 10075,9825 h30 r270
  text "ARML" at 10175,9825 h30 r270
  text "5V" at 10275,9825 h30 r270
  text "MRB" at 10375,9825 h30 r270
  text "MRA" at 10475,9825 h30 r270
  text "+5V" at 9650,7475 h30 r270
  text "TRIG" at 9750,7475 h30 r270
  text "ECHO" at 9850,7475 h30 r270
  text "GND" at 9950,7475 h30 r270
  text "ANTA" at 10050,7475 h30 r270
  text "ANTB" at 10150,7475 h30 r270
  text "SPKB" at 8500,7425 h30
  text "SPKA" at 8500,7300 h30
  text "+5V" at 8500,7125 h30
  text "SPK" at 8500,6925 h30
  text "GND" at 8500,6825 h30
  text "http://plobot.com" at 11250,6500 h50
  text "Rodolfo Cossovich" at 11200,6400 h30
  text "Sean Purser-Haskell" at 11200,6350 h30
  text "Ivan Tchekashkin" at 11200,6300 h30
  text "20 JAN 2017" at 11150,6250 h30
  text "GND" at 8425,6175 h30
  text "3V" at 11425,6175 h30
  text "+3V" at 8425,6075 h30
  text "GND" at 11425,6075 h30
  text "+5V" at 8425,5975 h30
  text "SCL" at 11425,5975 h30
  text "VBAT" at 8425,5875 h30
  text "SDA" at 11425,5875 h30
  text "+" at 9125,5500 h30 r90
  text "-" at 9325,5500 h30 r90
  text "XSP_header" at 10775,5475 h30
Bottom Solder:
  region: 10910,10040 10910,9840 10950,9840 10950,10040
  region: 10895,10125 10700,10125 10700,10075 10895,10075
  region: 10915,10075 10700,10075 10700,9840 10915,9840
Mechanical 1:
  drawing of 188 lines, arcs and shapes, not listed
Mechanical 2:
  drawing of 1621 lines, arcs and shapes, not listed

## Text inside footprints (layer, text, board x,y; h text height)
J1: Bottom Overlay "1" at 10855,5235.85 h30; Bottom Overlay "7" at 10415,5235.85 h30; Bottom Overlay "8" at 10415,5335.85 h30; Bottom Overlay "2" at 10855,5335.85 h30
MIC1: Top Overlay "+" at 11219,6206 h30 r180